# Altium PCB DStep.PcbDoc
Units mil, origin at the board's own origin, x right, y up, seen from the top; angles counter-clockwise.
Board outline 3210.03 x 2110.03 mil, 2 copper layers (Top Layer, Bottom Layer); 37 components, 62 nets, 186 pads, 28 vias.
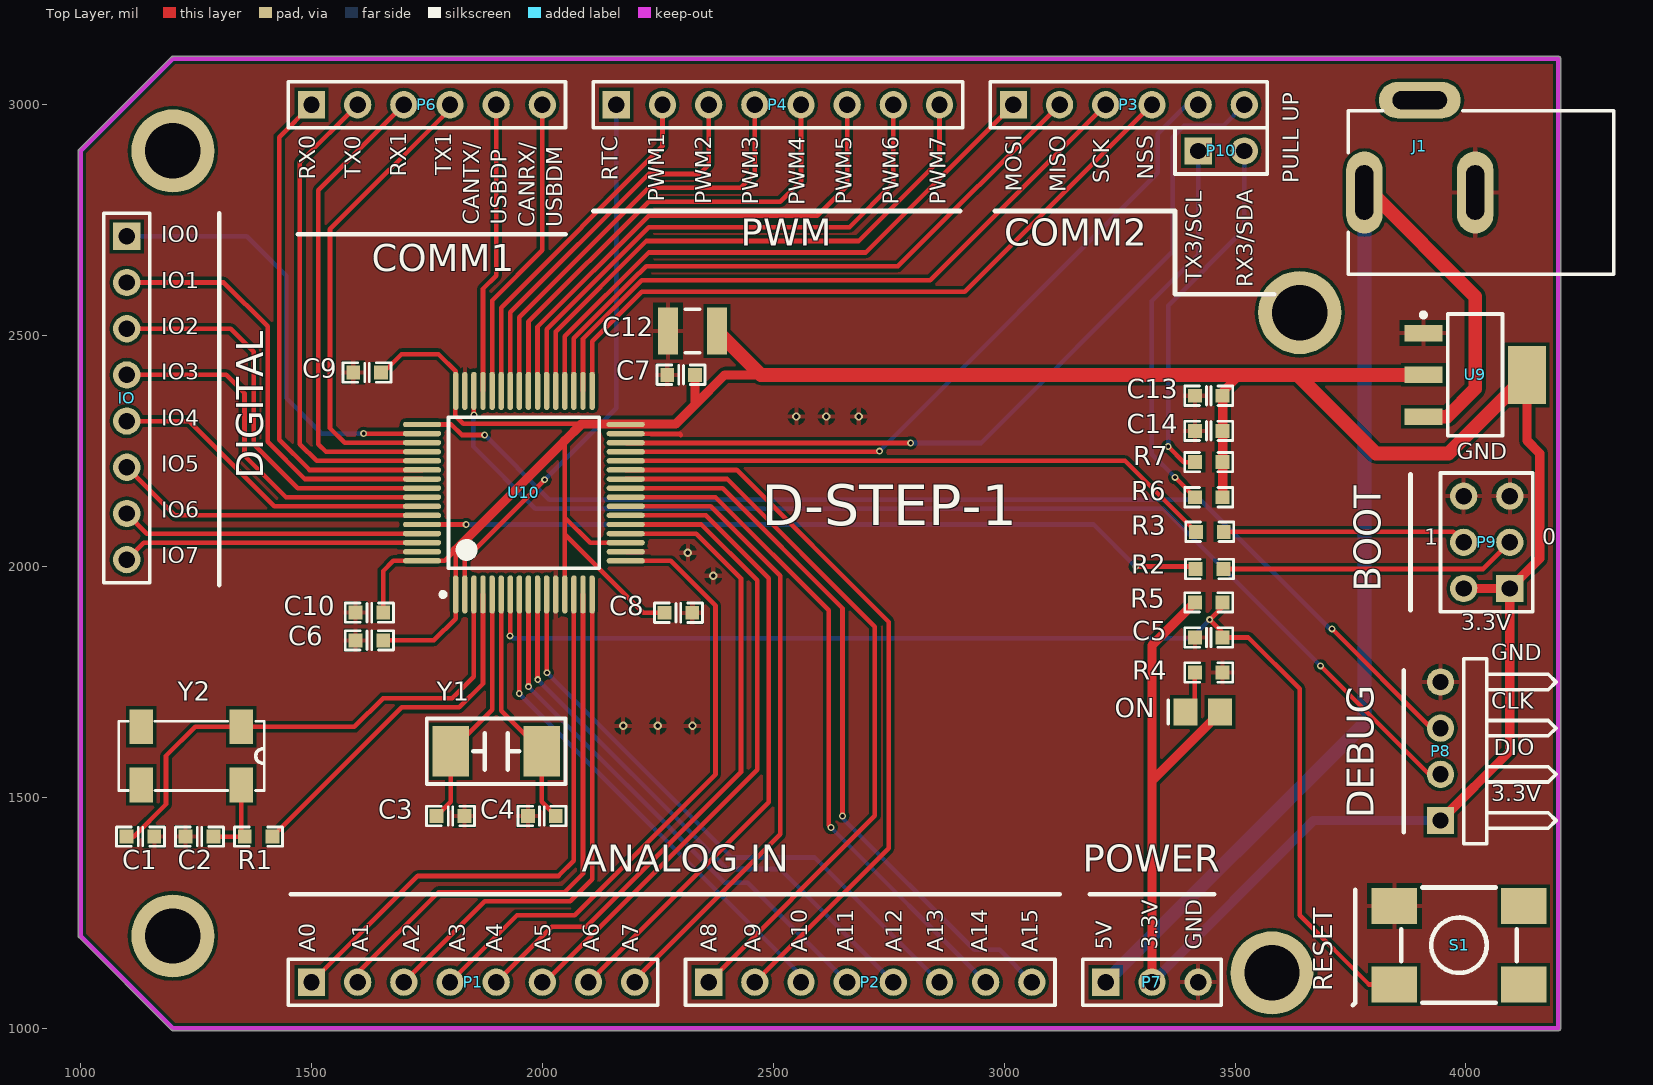
[diagram p0: Top Layer view]
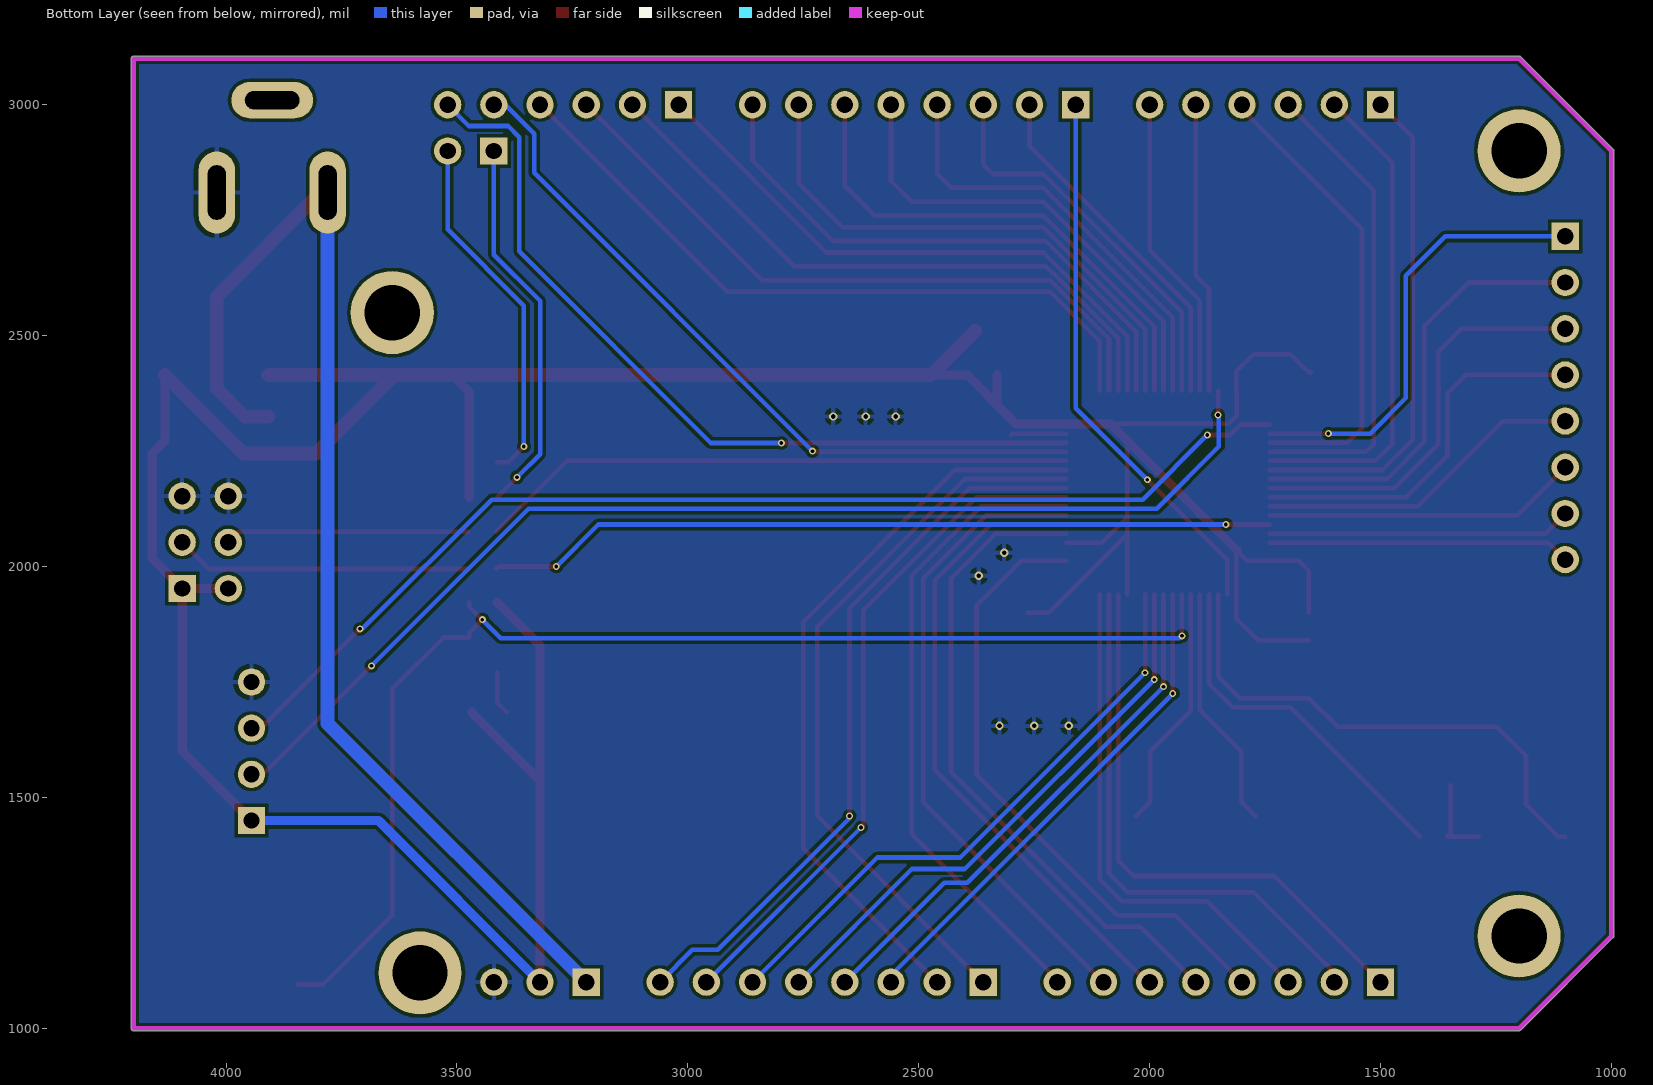
[diagram p1: Bottom Layer view, seen from below]
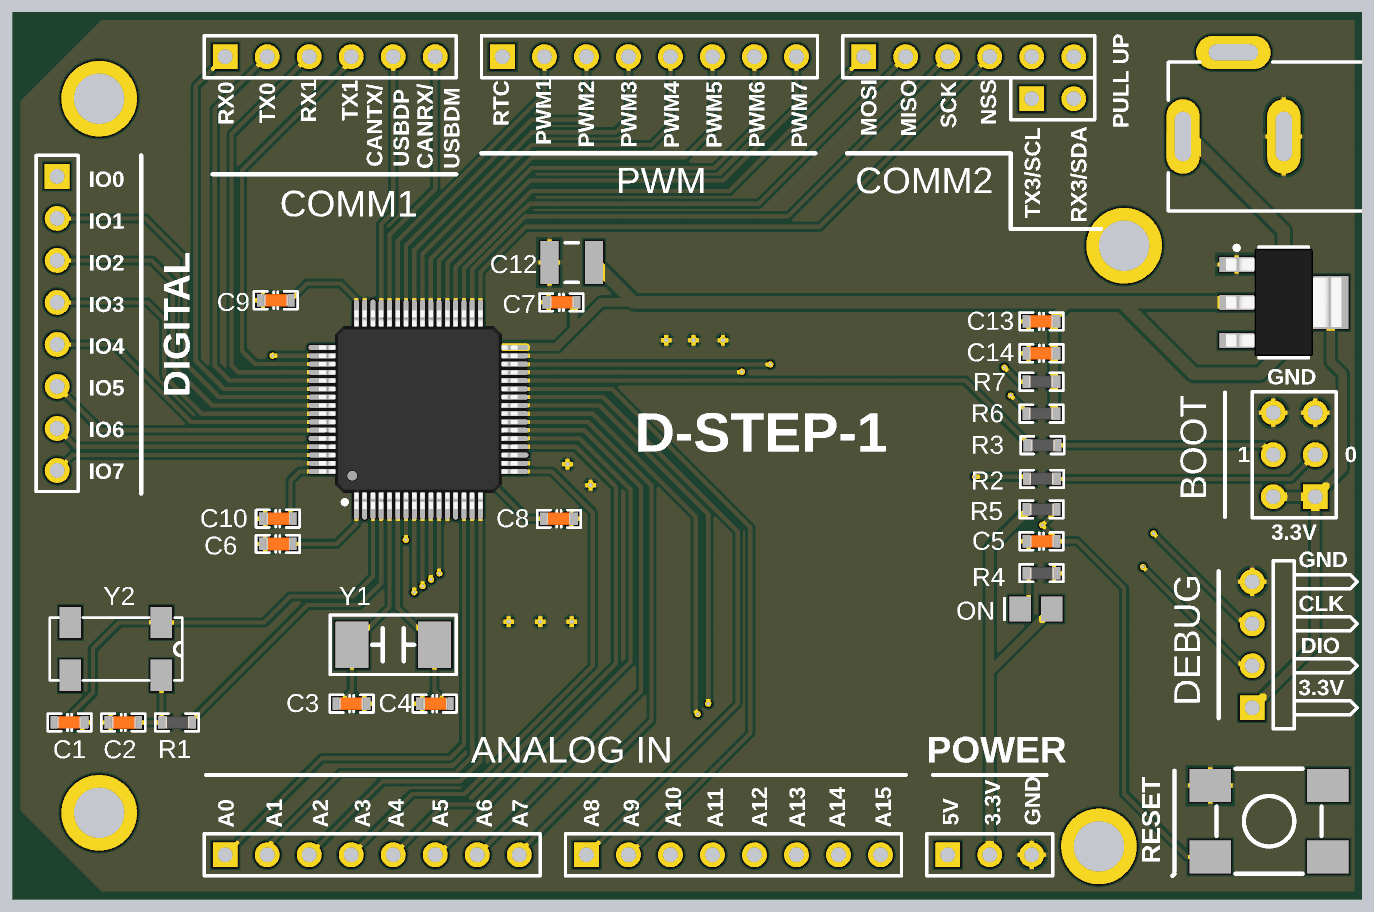
[diagram p2: 3D render of the assembled board from above, using the file's embedded part models]

## Layer stack, top to bottom
Top Solder: solder mask 0.4, Solder Resist, Dk 3.5
Top Layer: signal copper 1.4
Dielectric 1: dielectric 12.6, FR-4, Dk 4.8
Bottom Layer: signal copper 1.4
Bottom Solder: solder mask 0.4, Solder Resist, Dk 3.5

## Board outline
994.99,1200 994.99,2900 cw(c1000,2900) 996.47,2903.56 996.45,2903.55 1196.45,3103.55 1196.44,3103.53 cw(c1200,3100) 1200,3105.01 4200,3105.01 cw(c4200,3100) 4205.02,3100 4205.02,1000 cw(c4200,1000) 4200,994.99 1200,994.99 cw(c1200,1000) 1196.44,996.47 1196.45,996.45 996.45,1196.45 996.47,1196.44 cw(c1000,1200)

## Design rules (kind name [scope] priority, off if disabled: settings)
Clearance [All] p1: gap=7
ComponentClearance [All] p1 off: gap=10 collisioncheckmode=3 verticalgap=10 showdistances=FALSE
PolygonConnect [All] p1: connectstyle=Relief reliefconductorwidth=10 reliefentries=4 polygonreliefangle="90 Angle" airgapwidth=10
RoutingVias [All] p1: holewidth=8 width=15 viastyle="Through Hole" minholewidth=8 minwidth=15 maxholewidth=15 maxwidth=20
SolderMaskExpansion [All] p1: expansion=4
Width [All] p1: maxlimit=30 minlimit=10 preferedwidth=10
29 further rules are at their usual default settings.

## Classes and differential pairs
component class Connector: IO P1 P2 P3 P4 P6 P7
component class STM32: BOOT C1 C2 C3 C4 C5 C6 C7 C8 C9 C10 C12 C13 C14 J1 ON P9 P10 R1 R2 R3 R4 R5 R6 R7 S1 U9 U10 Y1 Y2

## Components (designator, comment, footprint, x,y, rotation, side; value= is the part's Value field where it differs from the comment)
C1 "20pF" C0603 1160,1415.38 r180 top
C2 "20pF" C0603 1227.15,1415 r0 top
C3 "10pF" C0603 1831.41,1460 r180 top
C4 "10pF" C0603 1968.59,1459.62 r0 top
C5 "1μF" C0603 3412.76,1846.27 r0 top
C6 "0.1μF" C0603 1595,1840 r0 top
C7 "0.1μF" C0603 2270,2415 r0 top
C8 "0.1μF" C0603 2325,1900 r180 top
C9 "0.1μF" C0603 1590,2420 r0 top
C10 "0.1μF" C0603 1595,1900 r0 top
C12 "47μF" C1210 2325,2510 r0 top
C13 "0.22μF" C0603 3473.46,2370 r180 top
C14 "CAP" C0603 3473.46,2294.07 r180 top
IO "Header 8" HDR1X8 1100,2715 r270 top (schematic designator P5)
J1 "PWIN3-2" DC-005 3745,2810 r0 top
ON "LED2" LED_0805 3430,1685 r180 top (schematic designator D1)
P1 "Header 8" HDR1X8 1500,1100 r0 top
P2 "Header 8" HDR1X8 2360,1100 r0 top
P3 "Header 6" HDR1X6 3020,3000 r0 top
P4 "Header 8" HDR1X8 2160,3000 r0 top
P6 "Header 6" HDR1X6 1500,3000 r0 top
P7 "Header 3" HDR1X3 3220,1100 r0 top
P8 "Header 4H" HDR1X4H 3945,1450 r90 top
P9 "Header 3X2" HDR2X3 4095,1952.49 r90 top
P10 "Header 2" HDR1X2 3420,2900 r0 top
R1 "Res1" R0603 1355,1415 r0 top
R2 "Res1" R0603 3475,1995 r180 top
R3 "Res1" R0603 3415,2075 r0 top
R4 "Res1" R0603 3412.76,1770.34 r0 top
R5 "Res1" R0603 3412.76,1922.19 r0 top
R6 "Res1" R0603 3473.46,2150.36 r180 top
R7 "Res1" R0603 3473.46,2226.29 r180 top
S1 "SW-PB" SW_PB4_A1 3985,1180 r0 top
U9 "1117" SOT223_L 4020,2415 r0 top
U10 "STM32F103RBT6" LQFP-64 1960,2160 r90 top
Y1 "8MHz" 5032 1900,1600 r0 top
Y2 "32.768KHz" MC-306 1240,1590 r180 top

## Footprints (in the part's own frame and the unit in brackets; to place one, negate y for a bottom-side part, rotate by r counter-clockwise, add the part's x,y. Pads: shape width x height; smd on the part's side, far side on the other; paste and mask are expansions set on the pad)
5032 [mm]
  rect 2x2.8 smd: 1(-2.5,0) 2(2.5,0)
  silkscreen extent -3.81,-1.8 3.81,1.8
C0603 [mil]
  rect 30x30 smd: 1(0.35,0.19) 2(60.35,0.19)
  silkscreen extent -22,-21 82,21, body extent 2,-15 62,15, height 31
C1210 [mm] "Chip Capacitor, Body 3.2x2.5mm, IPC High Density"
  rect 1.1x2.6 smd: 1(-1.35,0) 2(1.35,0)
  silkscreen extent -0.4,-1.2 0.4,1.2, body extent -1.7,-1.35 1.7,1.35, height 1.3
DC-005 [mm] "DC母座5.5mm"
  oval 2x4.5 hole 1 slot 3 at 90 deg: 1(0.889,0) 2(6.985,0)
  oval 4.5x2 hole 1 slot 3 at 0 deg: 3(3.937,5.08)
  silkscreen extent 0,-4.5 14.6,4.5, body extent 0,-4.44 14.6,4.44, height 11
HDR1X2 [mm] "Connector; Header; 2 Position"
  rect 1.5x1.5 hole 0.9: 1(0,0)
  round 1.5 hole 0.9: 2(2.54,0)
  silkscreen extent -1.27,-1.27 3.81,1.27
HDR1X3 [mm] "Connector; Header; 3 Position"
  rect 1.5x1.5 hole 0.9: 1(0,0)
  round 1.5 hole 0.9: 2(2.54,0) 3(5.08,0)
  silkscreen extent -1.27,-1.27 6.35,1.27
HDR1X4H [mm] "Connector; Header; 4 Position; Right Angle"
  rect 1.5x1.5 hole 0.9: 1(0,0)
  round 1.5 hole 0.9: 2(2.54,0) 3(5.08,0) 4(7.62,0)
  silkscreen extent -1.27,-6.35 8.89,-1.27
HDR1X6 [mm] "Connector; Header; 6 Position"
  rect 1.5x1.5 hole 0.9: 1(0,0)
  round 1.5 hole 0.9: 2(2.54,0) 3(5.08,0) 4(7.62,0) 5(10.16,0) 6(12.7,0)
  silkscreen extent -1.27,-1.27 13.97,1.27
HDR1X8 [mm] "Connector; Header; 8 Position"
  rect 1.5x1.5 hole 0.9: 1(0,0)
  round 1.5 hole 0.9: 2(2.54,0) 3(5.08,0) 4(7.62,0) 5(10.16,0) 6(12.7,0) 7(15.24,0) 8(17.78,0)
  silkscreen extent -1.27,-1.27 19.05,1.27
HDR2X3 [mm] "Connector; Header; 3x2 Position"
  rect 1.5x1.5 hole 0.9: 1(0,0)
  round 1.5 hole 0.9: 2(0,2.54) 3(2.54,0) 4(2.54,2.54) 5(5.08,0) 6(5.08,2.54)
  silkscreen extent -1.27,-1.27 6.35,3.81
LED_0805 [mm] "贴片二极管"
  rect 1.3x1.5 smd: 1(-0.95,0) 2(0.95,0)
  silkscreen extent 1.91,-0.63 1.91,0.64
LQFP-64 [mm] "LQFP64"
  oval 2.1x0.3 smd: 1(-5.6,3.75) 2(-5.6,3.25) 3(-5.6,2.75) 4(-5.6,2.25) 5(-5.6,1.75) 6(-5.6,1.25) 7(-5.6,0.75) 8(-5.6,0.25) 9(-5.6,-0.25) 10(-5.6,-0.75) 11(-5.6,-1.25) 12(-5.6,-1.75) 13(-5.6,-2.25) 14(-5.6,-2.75) 15(-5.6,-3.25) 16(-5.6,-3.75) 33(5.6,-3.75) 34(5.6,-3.25) 35(5.6,-2.75) 36(5.6,-2.25) 37(5.6,-1.75) 38(5.6,-1.25) 39(5.6,-0.75) 40(5.6,-0.25) 41(5.6,0.25) 42(5.6,0.75) 43(5.6,1.25) 44(5.6,1.75) 45(5.6,2.25) 46(5.6,2.75) 47(5.6,3.25) 48(5.6,3.75)
  oval 0.3x2.1 smd: 17(-3.75,-5.6) 18(-3.25,-5.6) 19(-2.75,-5.6) 20(-2.25,-5.6) 21(-1.75,-5.6) 22(-1.25,-5.6) 23(-0.75,-5.6) 24(-0.25,-5.6) 25(0.25,-5.6) 26(0.75,-5.6) 27(1.25,-5.6) 28(1.75,-5.6) 29(2.25,-5.6) 30(2.75,-5.6) 31(3.25,-5.6) 32(3.75,-5.6) 49(3.75,5.6) 50(3.25,5.6) 51(2.75,5.6) 52(2.25,5.6) 53(1.75,5.6) 54(1.25,5.6) 55(0.75,5.6) 56(0.25,5.6) 57(-0.25,5.6) 58(-0.75,5.6) 59(-1.25,5.6) 60(-1.75,5.6) 61(-2.25,5.6) 62(-2.75,5.6) 63(-3.25,5.6) 64(-3.75,5.6)
  silkscreen extent -5.72,-4.15 4.15,4.57, body extent -6,-6 6,6, height 1.5
MC-306 [mm]
  rect 1.3x1.9 smd: 1(-2.75,-1.6) 2(2.75,-1.6) 3(2.75,1.6) 4(-2.75,1.6)
  silkscreen extent -4,-1.9 4,1.9
R0603 [mil]
  rect 30x30 smd: 1(0.35,0.19) 2(60.35,0.19)
  silkscreen extent -22,-21 82,21, body extent 2,-15 62,15, height 31
SOT223_L [mm] "SOT223, 4-Leads, Body 6.5x3.5mm, Pitch 2.3mm, Lead Span 7mm, IPC High Density"
  rect 2.1x0.9 smd: 1(-2.85,2.3) 2(-2.85,0) 3(-2.85,-2.3)
  rect 2.1x3.2 smd: 2(2.85,0)
  silkscreen extent -2.97,-3.35 1.5,3.42, body extent -3.48,-3.25 3.48,3.25, height 1.7
SW_PB4_A1 [mil]
  rect 98.42x78.74 smd: 1(-140,85) 2(-140,-85) 3(140,-85) 4(140,85)
  silkscreen extent -125,-125 125,125, body extent -125,-125 125,125, height 236

## Part data
C1 C2 C3 C4 C5 C6 C7 C8 C9 C10 C12: library part Cap, "Capacitor"
C13: library part CAPACITOR, "Capacitor"
C14: "Capacitor"
IO P1 P2 P4: "Header, 8-Pin"
ON: "Typical RED, GREEN, YELLOW, AMBER GaAs LED"
P3 P6: "Header, 6-Pin"
P7: "Header, 3-Pin"
P8: "Header, 4-Pin, Right Angle"
P9: "Header, 3-Pin, Dual row"
P10: "Header, 2-Pin"
R1 R2 R3 R4 R5 R6 R7: "Resistor"
S1: "Switch"
U9: library part VOLTREG
U10: "STM32 ARM-based 32-bit MCU with 128 Kbytes Flash, 64-pin LQFP, Industrial Temperature"
Y1 Y2: library part XTAL, "Crystal Oscillator"

## Free pads (board coordinates)
  round 180 hole 120: 3(1200,2900) 4(1200,1200) 7(3580,1120) 8(3640,2550)

## Via types
v1: diameter 15, hole 8, Top Layer to Bottom Layer, 20 vias
v2: diameter 18, hole 10, Top Layer to Bottom Layer, 8 vias

## Nets (pads, with @x,y where several pads share a name; then routed paths per layer and width w, separated by ;. In a path a pad name is that pad's centre, name@x,y a point inside that pad or via, vN(x,y) a via of type N, cw(c..) or ccw(c..) an arc to the next point about the centre after c; other vN are vias at no path point)
3.3V: C6.2 C7.2 C8.2 C9.2 C10.2 C12.2 C13.1 C14.1 ON.1 P7.2 P8.1 P9.1 P9.2 R5.1 R6.1 R7.1 U9.2 U10.1 U10.13 U10.19 U10.32 U10.48 U10.64 | length 8312
  Top Layer w10: C9.2 1655.19,2420.19 1695,2460 1775,2460 1812.36,2422.64 U10.48 1811.14,2380.47 1811.14,2326.14 1828.43,2308.86 2084.67,2308.86 ; C6.2 1765.19,1840.19 1812.36,1887.36 U10.1 1812.36,2034.11 1811.14,2035.33 1788.17,2012.36 U10.64 1677.36,2012.36 1655.35,1990.35 C10.2 ; U10.13 2048.58,2070 ; 2048.58,2272.77 2048.58,2070 ; 2050,2105 2103.27,2051.73 U10.19 ; C8.2 2218.77,1899.81 2048.58,2070
  Top Layer w20: 1811.14,2035.33 2048.58,2272.77 2084.67,2308.86 2288.86,2308.86 2330.35,2350.35 ; C7.2 2330.35,2350.35 ; 2473.15,2415 2395,2415 2330.35,2350.35 ; P7.2 3320,1536.07 ; R5.1 3320,1829.27 3320,1536.07 ; ON.1 3467.4,1683.47 3320,1536.07 ; R6.1 R7.1 C14.1 C13.1 3473.11,2378.27 3509.84,2415 3510,2415 ; P8.1 4095,1600 P9.1 ; P9.2 P9.1 ; U9.2@4132.2,2415 4132.2,2272.8 4160,2245 4160,2017.49 P9.1
  Top Layer w30: C12.2 2473.15,2415 3509.84,2415 ; 3510,2415 3635,2415 ; U9.2@3907.8,2415 3635,2415 ; U9.2@4132.2,2415 3962.2,2245 3805,2245 3635,2415
  Bottom Layer w20: P7.2 3670,1450 P8.1
5V: J1.1 P7.1 U9.3 | length 2612.4
  Top Layer w30: J1.1 3795,2810 4020,2585 4020,2385 3959.45,2324.45 U9.3
  Bottom Layer w30: P7.1 3780,1660 J1.1
AD0: P1.1 U10.14 | length 1253.6
  Top Layer w10: P1.1 1730,1330 2035,1330 2068.27,1363.27 U10.14
AD1: P1.2 U10.15 | length 1201.5
  Top Layer w10: P1.2 1600,1120 1775,1295 2047.95,1295 2087.95,1335 U10.15
AD2: P1.3 U10.16 | length 1116.7
  Top Layer w10: P1.3 1875,1275 2060,1275 2107.64,1322.64 U10.16
AD3: P1.4 U10.17 | length 1361.3
  Top Layer w10: P1.4 1945,1245 2070,1245 2375,1550 2375,1915 2277.64,2012.36 U10.17
AD4: P1.5 U10.20 | length 1427.9
  Top Layer w10: P1.5 2020,1220 2095,1220 2430,1555 2430,1975 2333.58,2071.42 U10.20
AD5: P1.6 U10.21 | length 1400.2
  Top Layer w10: P1.6 2005,1100 2465,1560 2465,1970 2343.9,2091.1 U10.21
AD6: P1.7 U10.22 | length 1402.3
  Top Layer w10: P1.7 2490,1490 2490,1975 2354.21,2110.79 U10.22
AD7: P1.8 U10.23 | length 1407.3
  Top Layer w10: U10.23 2364.53,2130.47 2515,1980 2515,1420 2200,1105 P1.8
AD8: P2.1 U10.26 | length 1591
  Top Layer w10: U10.26 2400.47,2189.53 2720,1870 2720,1460 P2.1
AD9: P2.2 U10.27 | length 1606
  Top Layer w10: U10.27 2420.79,2209.21 2750,1880 2750,1390 P2.2
AD10: P2.3 U10.8 | length 1092.3
  Top Layer w10: v1(1950,1725) 1950.16,1725.16 U10.8
  Bottom Layer w10: v1(1950,1725) 2560,1115 P2.3
AD11: P2.4 U10.9 | length 1154.7
  Top Layer w10: U10.9 1969.84,1740.16 v1(1970,1740)
  Bottom Layer w10: v1(1970,1740) 2395,1315 2445,1315 P2.4
AD12: P2.5 U10.10 | length 1226
  Top Layer w10: U10.10 1989.53,1755.47 v1(1990,1755)
  Bottom Layer w10: v1(1990,1755) 2400,1345 2515,1345 P2.5
AD13: P2.6 U10.11 | length 1297.4
  Top Layer w10: U10.11 2009.21,1770.79 v1(2010,1770)
  Bottom Layer w10: v1(2010,1770) 2410,1370 2590,1370 P2.6
AD14: P2.7 U10.24 | length 1486.9
  Top Layer w10: U10.24 2374.84,2150.16 2620,1905 2620,1440 v1(2625,1435)
  Bottom Layer w10: v1(2625,1435) P2.7
AD15: P2.8 U10.25 | length 1589.2
  Top Layer w10: U10.25 2390.16,2169.84 2650,1910 v1(2650,1460)
  Bottom Layer w10: v1(2650,1460) 2650,1455 2935,1170 2990,1170 P2.8
BOOT0: R2.2 U10.60 | length 1715
  Top Layer w10: U10.60 v1(1835,2091.1) ; v1(3285,2000) 3409.46,2000 R2.2
  Bottom Layer w10: v1(1835,2091.1) 3193.9,2091.1 v1(3285,2000)
BOOT1: R3.1 U10.28 | length 1298.5
  Top Layer w10: U10.28 3261.64,2228.9 R3.1
CAN_RX/USBDM: P6.6 U10.44 | length 664.6
  Top Layer w10: U10.44 1891.1,2576.1 2000,2685 P6.6
CAN_TX/USBDP: P6.5 U10.45 | length 631.4
  Top Layer w10: U10.45 1871.42,2601.42 1900,2630 P6.5
GND: C1.1 C2.1 C3.1 C4.1 C5.1 C6.1 C7.1 C8.1 C9.1 C10.1 C12.1 C13.2 C14.2 J1.2 P7.3 P8.4 P9.5 P9.6 R4.2 S1.1 U9.1 U10.12 U10.18 U10.31 U10.47 U10.63 | length 120.8
  Top Layer w10: U10.31 2297.05,2287.95 2300,2285
  other v2: 2175,1655 2250,1655 2325,1655 2370,1980 2315,2030 2550,2325 2615,2325 2685,2325
IO1: IO.1 U10.50 | length 971.6
  Top Layer w10: v1(1612.95,2287.95) U10.50
  Bottom Layer w10: IO.1 1360,2715 1445,2630 1445,2365 1522.05,2287.95 v1(1612.95,2287.95)
IO2: IO.2 U10.55 | length 962.2
  Top Layer w10: IO.2 1310,2615 1405,2520 1405,2270 1485.47,2189.53 U10.55
IO3: IO.3 U10.56 | length 899.7
  Top Layer w10: IO.3 1325,2515 1375,2465 1375,2265 1470.16,2169.84 U10.56
IO4: IO.4 U10.57 | length 828.3
  Top Layer w10: IO.4 1315,2415 1355,2375 1355,2240 1444.84,2150.16 U10.57
IO5/I2C1_SCL: IO.5 U10.58 | length 716
  Top Layer w10: IO.5 1235,2315 1419.53,2130.47 U10.58
IO6/I2C1_SDA: IO.6 U10.59 | length 682.7
  Top Layer w10: IO.6 1204.21,2110.79 U10.59
IO7: IO.7 U10.61 | length 657.6
  Top Layer w10: IO.7 1143.58,2071.42 U10.61
IO8: IO.8 U10.62 | length 654.7
  Top Layer w10: IO.8 1136.73,2051.73 U10.62
NetC2_2: C2.2 R1.1 Y2.4 | length 182.6
  Top Layer w10: C2.2 R1.1 1348.27,1422.27 Y2.4
NetD1_2: ON.2 R4.1 | length 94
  Top Layer w10: ON.2 3413.11,1705.51 R4.1
NetP9_3: P9.3 R2.1 | length 644.2
  Top Layer w10: R2.1 4037.32,1994.81 P9.3
NetP9_4: P9.4 R3.2 | length 529.1
  Top Layer w10: R3.2 3972.3,2075.19 P9.4
NetP10_1: P10.1 R6.2 | length 829.8
  Top Layer w10: v1(3370,2193.28) R6.2
  Bottom Layer w10: v1(3370,2193.28) 3320,2243.28 3320,2575 3420,2675 P10.1
NetP10_2: P10.2 R7.2 | length 780.5
  Top Layer w10: v1(3355,2260) 3388.9,2226.1 R7.2
  Bottom Layer w10: v1(3355,2260) 3355,2565 3520,2730 P10.2
OSC32_IN: C1.2 U10.3 Y2.1 | length 1134.9
  Top Layer w10: C1.2 1115.19,1415.19 1185,1485 1185,1590 1247.99,1652.99 Y2.1 1592.99,1652.99 1655,1715 1805,1715 1851.73,1761.73 U10.3
OSC32_OUT: R1.2 U10.4 | length 786.4
  Top Layer w10: R1.2 1695.16,1695 1820,1695 1871.42,1746.42 U10.4
OSC_IN: C3.2 U10.5 Y1.1 | length 529.4
  Top Layer w10: C3.2 1801.57,1490.32 Y1.1 1891.1,1689.53 U10.5
OSC_OUT: C4.2 U10.6 Y1.2 | length 528.7
  Top Layer w10: U10.6 1910.79,1687.64 Y1.2 1998.43,1490.32 C4.2
PWM0: P4.2 U10.43 | length 764.2
  Top Layer w10: U10.43 1910.79,2560.79 2260,2910 P4.2
PWM1: P4.3 U10.42 | length 861.9
  Top Layer w10: U10.42 1930.47,2550.47 2230,2850 2340,2850 2360,2870 P4.3
PWM2: P4.4 U10.41 | length 947.9
  Top Layer w10: U10.41 1950.16,2540.16 2230,2820 2430,2820 2460,2850 P4.4
PWM3: P4.5 U10.40 | length 1030.9
  Top Layer w10: U10.40 1969.84,2529.84 2230,2790 2515,2790 2560,2835 P4.5
PWM4: P4.6 U10.39 | length 1111.1
  Top Layer w10: U10.39 1989.53,2519.53 2230,2760 2595,2760 2660,2825 P4.6
PWM5: P4.7 U10.38 | length 1185.3
  Top Layer w10: U10.38 2009.21,2514.21 2230,2735 2665,2735 2760,2830 P4.7
PWM6: P4.8 U10.37 | length 1233.2
  Top Layer w10: U10.37 2028.9,2508.9 2225,2705 2685,2705 2860,2880 P4.8
RESET: C5.2 R5.2 S1.2 U10.7 | length 2692.8
  Top Layer w10: v1(1930,1850) 1930.47,1850.47 U10.7 ; R5.2 3473.11,1913.11 v1(3445,1885) 3473.11,1856.89 C5.2 3528.54,1846.46 3640,1735 3640,1245 3790,1095 S1.2
  Bottom Layer w10: v1(1930,1850) 1935,1845 3405,1845 v1(3445,1885)
RTC: P4.1 U10.2 | length 1196.3
  Top Layer w10: U10.2 1832.05,2015 v1(2005,2187.95)
  Bottom Layer w10: v1(2005,2187.95) 2160,2342.95 P4.1
SPI_MISO: P3.2 U10.35 | length 1375.1
  Top Layer w10: U10.35 2068.27,2494.48 2208.79,2635 2210,2635 2225,2650 2770,2650 P3.2
SPI_MOSI: P3.1 U10.36 | length 1297.2
  Top Layer w10: U10.36 2048.58,2498.58 2230,2680 2700,2680 P3.1
SPI_NSS: P3.4 U10.33 | length 1531.8
  Top Layer w10: U10.33 2107.64,2487.64 2215,2595 2915,2595 P3.4
SPI_SCK: P3.3 U10.34 | length 1454.6
  Top Layer w10: U10.34 2087.95,2492.95 2215,2620 2840,2620 P3.3
SWCLK: P8.3 U10.49 | length 2477.9
  Top Layer w10: U10.49 1802.36,2307.64 1825,2285 v1(1875,2285) ; v1(3710,1865) 3925,1650 P8.3
  Bottom Layer w10: v1(1875,2285) 2015,2145 3425,2145 3705,1865 v1(3710,1865)
SWDIO: P8.2 U10.46 | length 2510.3
  Top Layer w10: v1(1851.73,2328.27) U10.46 ; v1(3685,1785) 3920,1550 P8.2
  Bottom Layer w10: v1(1851.73,2328.27) 1850,2326.54 1850,2260 1985,2125 3345,2125 v1(3685,1785)
UART3_RX/I2C2_SDA: P3.6 U10.30 | length 1788.2
  Top Layer w10: U10.30 2181.24,2267.5 v1(2797.5,2267.5)
  Bottom Layer w10: v1(2797.5,2267.5) 2950,2267.5 3365,2682.5 3365,2930 3389.06,2954.06 3474.06,2954.06 P3.6
UART3_TX/I2C2_SCL: P3.5 U10.29 | length 1600.6
  Top Layer w10: U10.29 2728.58,2248.58 v1(2730,2250)
  Bottom Layer w10: v1(2730,2250) 3332.5,2852.5 3332.5,2937.5 3395,3000 P3.5
UART4_RX: P6.3 U10.52 | length 1043
  Top Layer w10: P6.3 1515,2815 1515,2265 1531.42,2248.58 U10.52
UART4_TX: P6.4 U10.51 | length 1020.4
  Top Layer w10: U10.51 1571.73,2268.27 1540,2300 1540,2730 1800,2990 P6.4
UART5_RX: P6.1 U10.54 | length 1090.8
  Top Layer w10: P6.1 1430,2930 1430,2275 1495.79,2209.21 U10.54
UART5_TX: P6.2 U10.53 | length 1066.3
  Top Layer w10: P6.2 1475,2875 1475,2265 1511.1,2228.9 U10.53
pads on no net: J1.3 S1.3 S1.4 Y2.2 Y2.3

## Polygon pours and split planes (outlines as drawn)
GND on Bottom Layer "Top Layer GND" (solid, pour order 8): 1000,1205 1000,2895 1000,2900 1200,3100 4195,3100 4195,1010 4200,1005 4195,1000 1205,1000
GND on Top Layer "Top Layer GND" (solid, pour order 10): 1000,2895 1205,3100 4195,3100 4195,1000 1205,1000 1000,1205

## Keep-outs
Keep-Out Layer:
  lines w10: 1000,1200 1200,1000 ; 1000,1200 1000,2900 ; 1000,1200 1200,1000 ; 1000,2900 1200,3100 ; 1000,2900 1200,3100 ; 1200,1000 4200,1000 4200,3100 1200,3100

## Silkscreen, mask and mechanical layers (free items; w line width, h text height)
Top Overlay:
  lines w10: 1300,1960 1300,2765 ; 1455,1290 3120,1290 ; 1470,2720 2050,2720 ; 2110,2770 2905,2770 ; 2980,2770 3370,2770 3370,2590 3585,2590 ; 3185,1290 3455,1290 ; 3755,1050 3760,1055 3760,1300 ; 3865,1425 3865,1775 ; 3880,1905 3880,2200
  text "TX1" at 1815,2847.19 h60 r90
  text "RX1" at 1716.67,2843.91 h60 r90
  text "TX0" at 1618.33,2841.16 h60 r90
  text "RX0" at 1520,2837.89 h60 r90
  text "NSS" at 3335,2837.55 h60 r90
  text "RTC" at 2175,2835 h60 r90
  text "SCK" at 3240,2830 h60 r90
  text "PULL UP" at 3650,2830 h60 r90
  text "MOSI" at 3050,2811.4 h60 r90
  text "MISO" at 3145,2810.11 h60 r90
  text "PWM1" at 2275.99,2790.13 h60 r90
  text "PWM2" at 2377.51,2784.16 h60 r90
  text "PWM3" at 2479.03,2783.75 h60 r90
  text "PWM7" at 2885,2783.87 h60 r90
  text "PWM4" at 2580.56,2782.7 h60 r90
  text "PWM5" at 2681.96,2783.11 h60 r90
  text "PWM6" at 2783.6,2783.4 h60 r90
  text "CANTX/ / USBDP" at 1935,2740 h60 r90
  text "CANRX/ / USBDM" at 2055,2735 h60 r90
  text "IO0" at 1175,2690 h60
  text "PWM" at 2430,2675 h100
  text "COMM2" at 3000,2675 h100
  text "COMM1" at 1630,2620 h100
  text "TX3/SCL" at 3440,2615 h60 r90
  text "RX3/SDA" at 3550,2605 h60 r90
  text "IO1" at 1175,2590.71 h60
  text "IO2" at 1175,2491.43 h60
  text "IO3" at 1175,2392.14 h60
  text "IO4" at 1175,2292.86 h60
  text "GND" at 3980,2220 h60
  text "IO5" at 1175,2193.57 h60
  text "DIGITAL" at 1415,2190 h100 r90
  text "IO6" at 1175,2094.29 h60
  text "D-STEP-1" at 2475,2060 h150
  text "1" at 3910,2035 h60
  text "0" at 4165,2035 h60
  text "IO7" at 1175,1995 h60
  text "BOOT" at 3835,1945 h100 r90
  text "3.3V" at 3990,1850 h60
  text "GND" at 4055,1785 h60
  text "CLK" at 4055,1680 h60
  text "DIO" at 4060,1580 h60
  text "3.3V" at 4055,1480 h60
  text "DEBUG" at 3820,1455 h100 r90
  text "ANALOG IN" at 2085,1319.9 h100
  text "POWER" at 3170,1320 h100
  text "5V" at 3245,1170 h60 r90
  text "3.3V" at 3345,1170 h60 r90
  text "GND" at 3440,1170 h60 r90
  text "A0" at 1520,1165 h60 r90
  text "A1" at 1635,1165 h60 r90
  text "A2" at 1745,1165 h60 r90
  text "A3" at 1845,1165 h60 r90
  text "A4" at 1925,1165 h60 r90
  text "A5" at 2030,1165 h60 r90
  text "A6" at 2135,1165 h60 r90
  text "A7" at 2220,1165 h60 r90
  text "A8" at 2390,1165 h60 r90
  text "A9" at 2485,1165 h60 r90
  text "A10" at 2585,1165 h60 r90
  text "A11" at 2685,1165 h60 r90
  text "A12" at 2790,1165 h60 r90
  text "A13" at 2880,1165 h60 r90
  text "A14" at 2975,1165 h60 r90
  text "A15" at 3085,1165 h60 r90
  text "RESET" at 3725,1080 h70 r90